# Altium PCB VI.595X5.V1.1.PcbDoc
Units mm, origin at the board's own origin, x right, y up, seen from the top; angles counter-clockwise.
Board outline 86.36 x 66.04 mm, 2 copper layers (Top Layer, Bottom Layer); 110 components, 95 nets, 301 pads, 83 vias.
Unrouted connection lines stored in the file: 1.
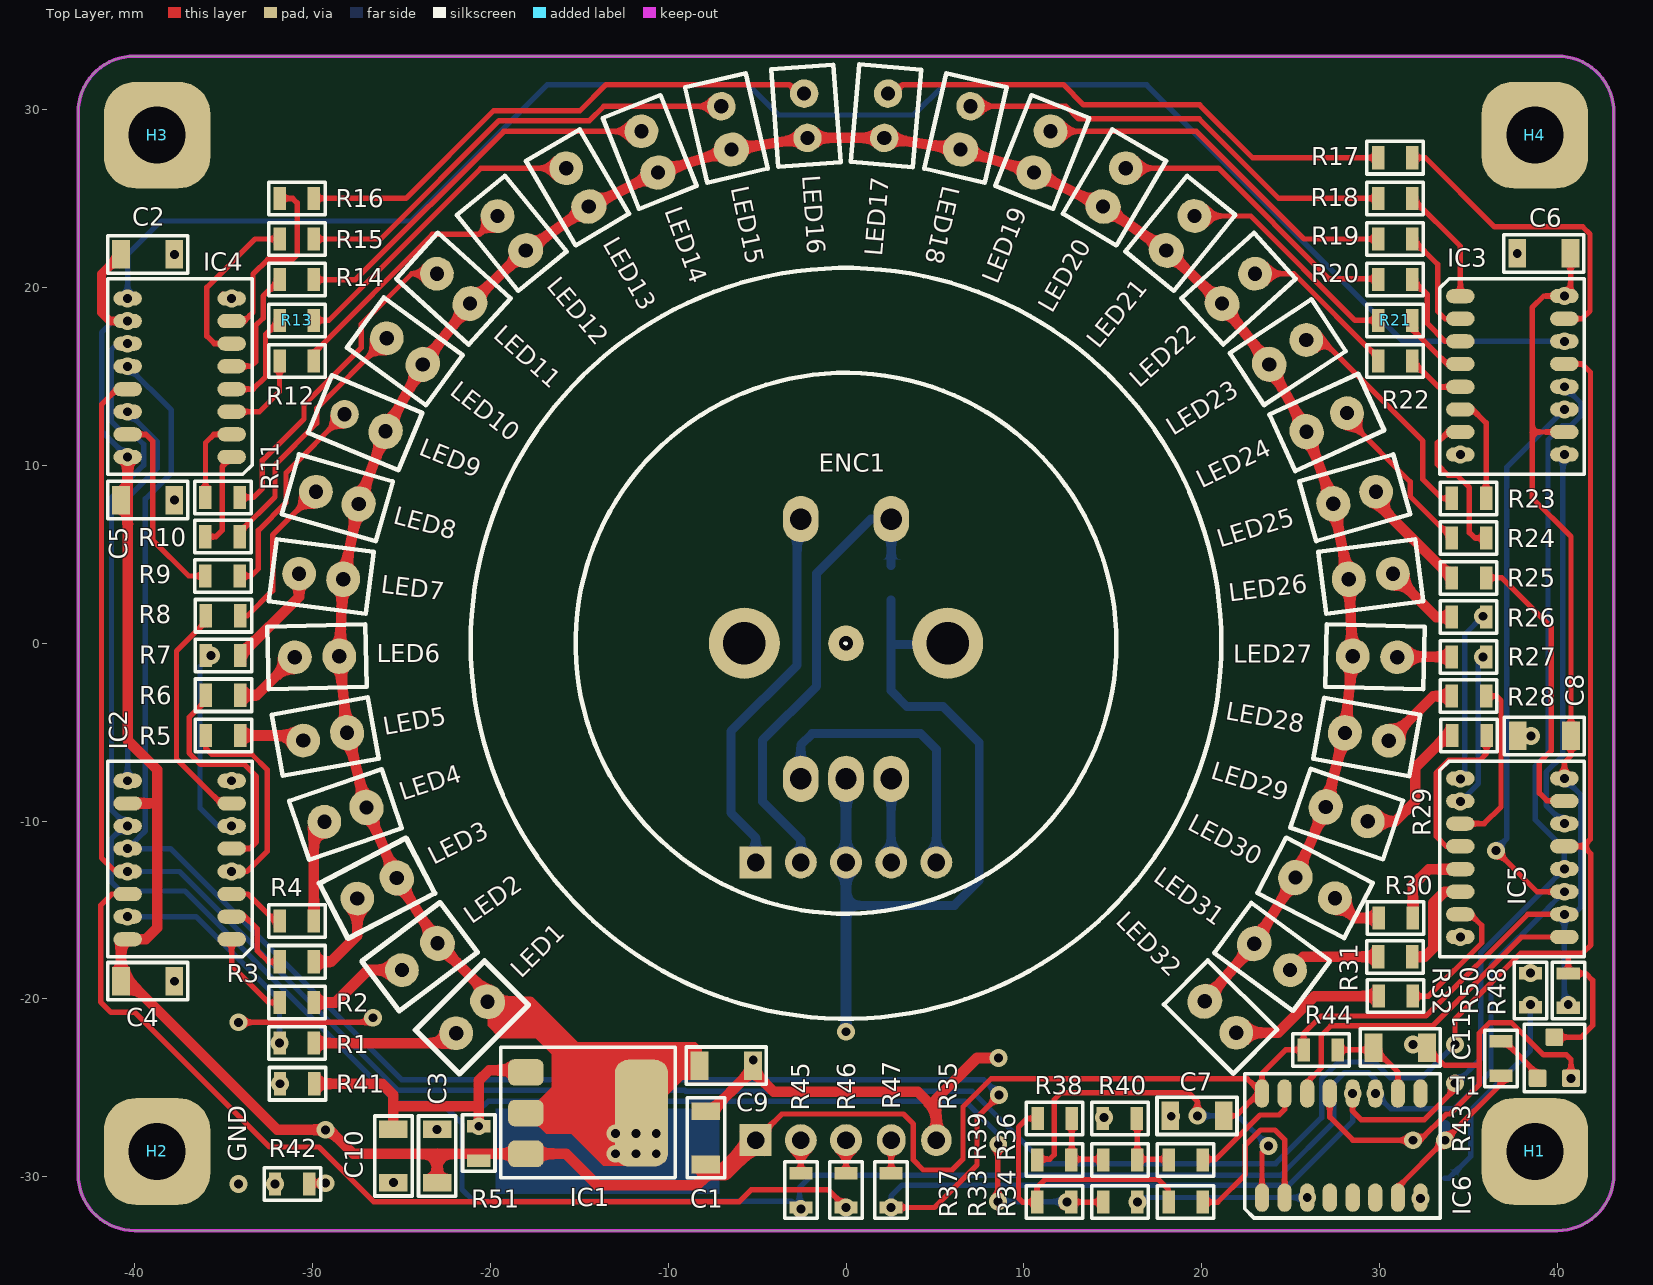
[diagram p0: Top Layer view]
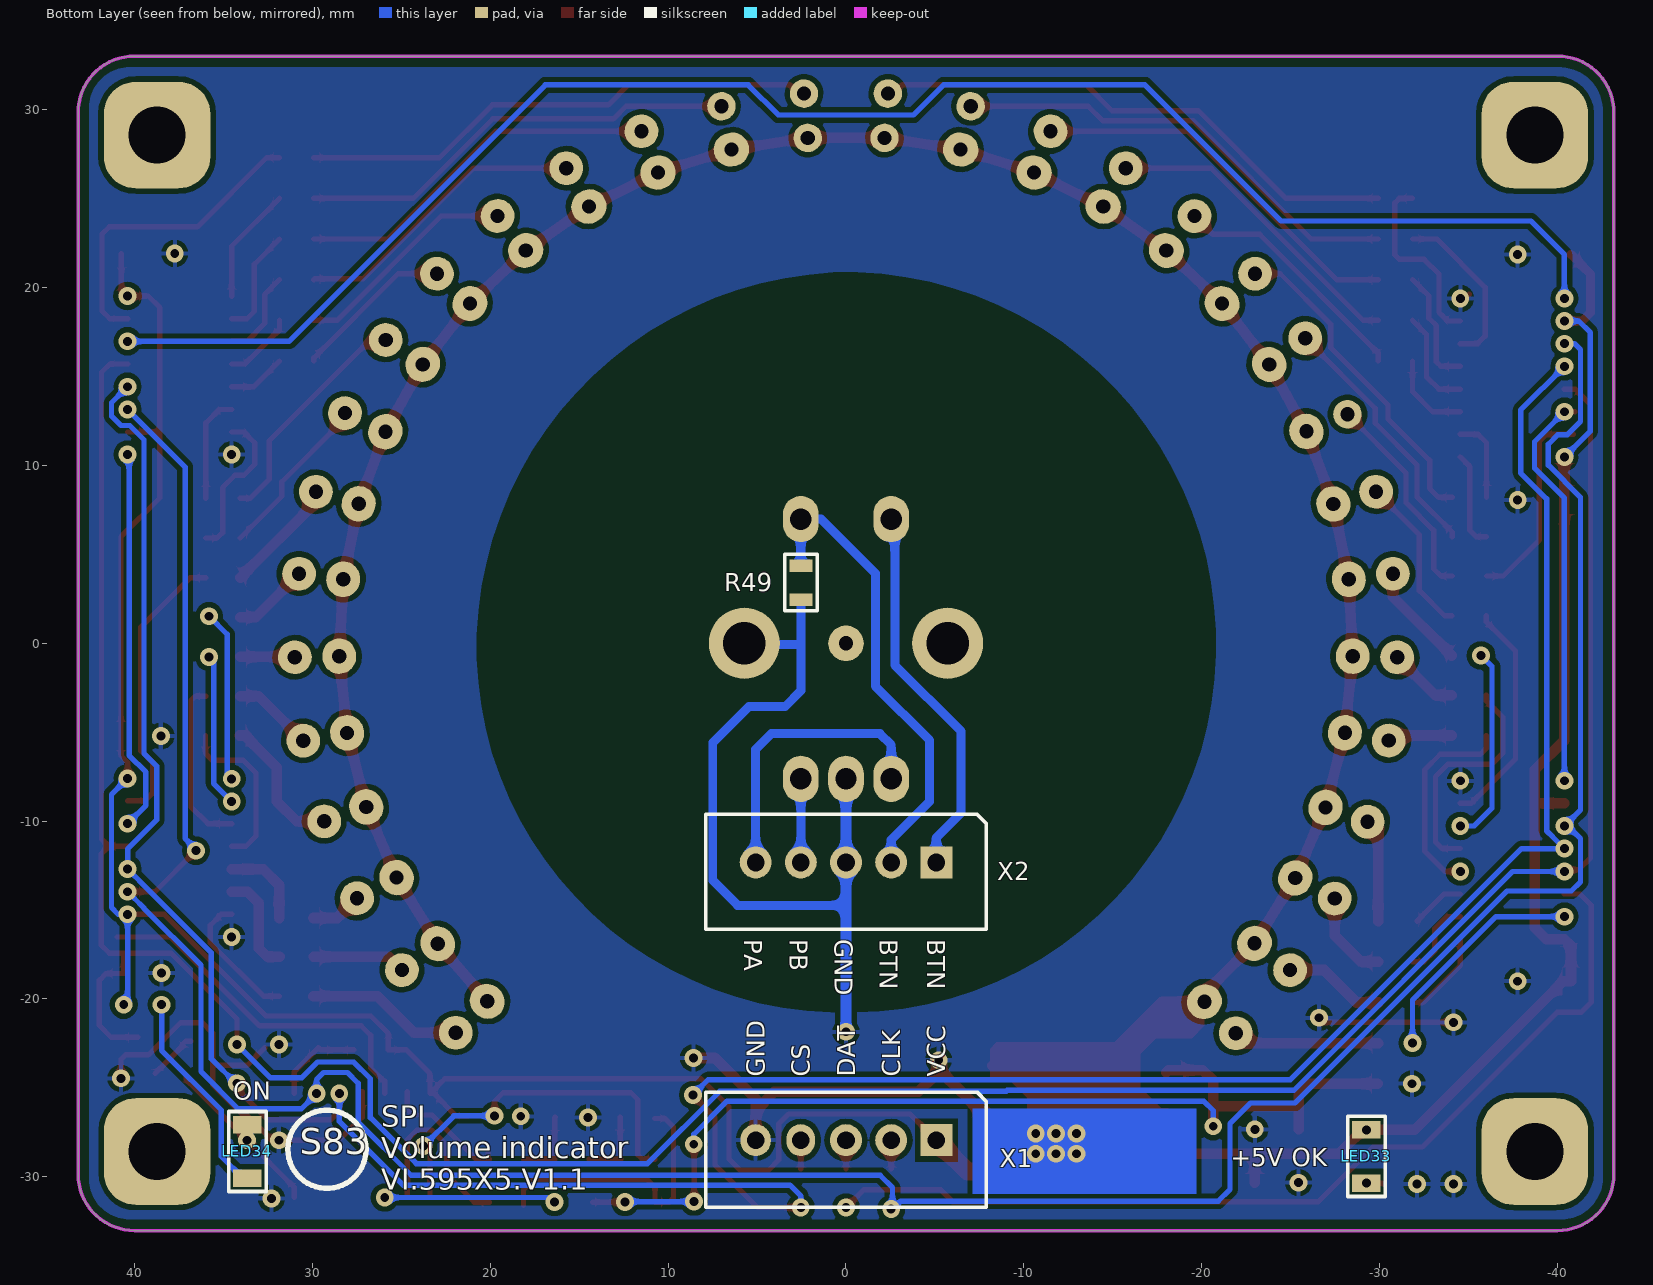
[diagram p1: Bottom Layer view, seen from below]
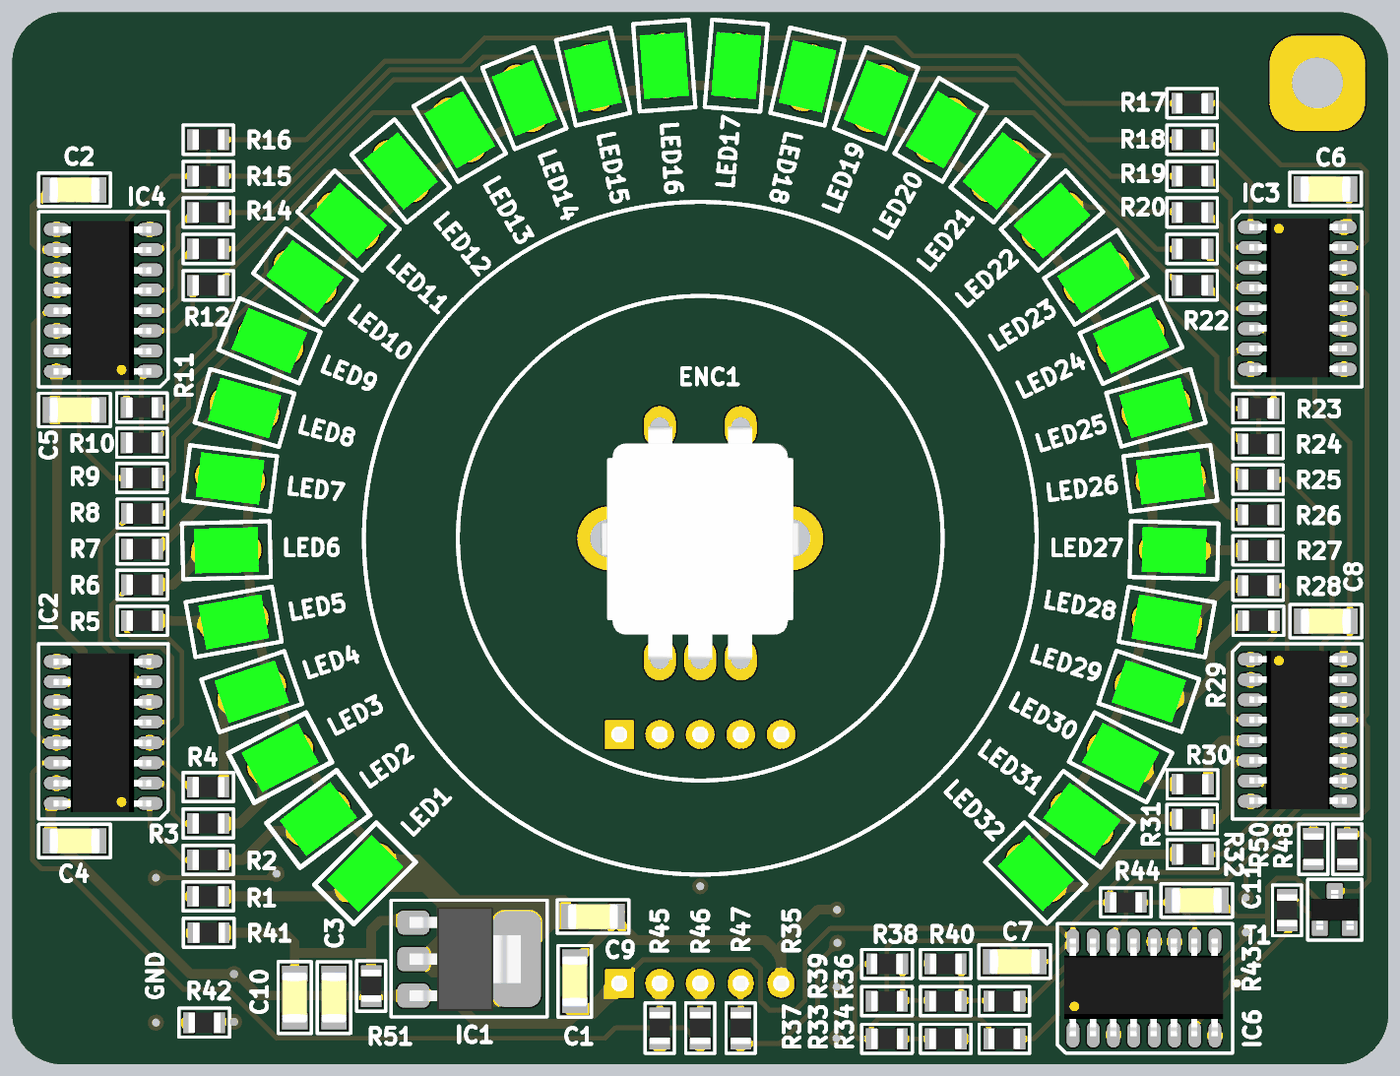
[diagram p2: 3D render of the assembled board from above, using the file's embedded part models]
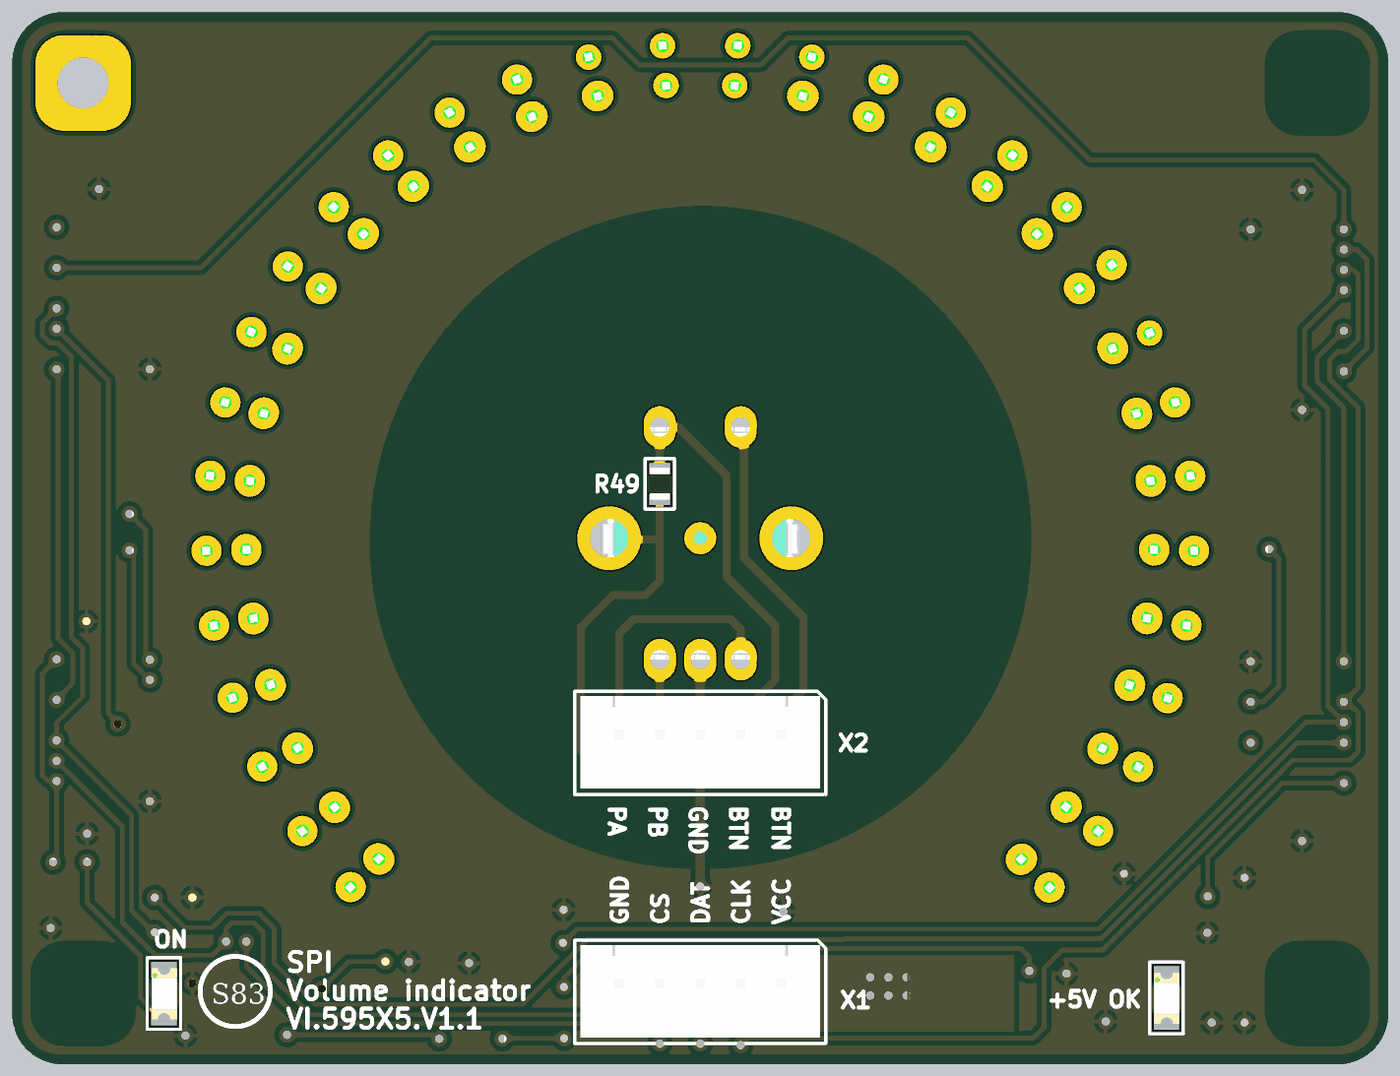
[diagram p3: 3D render of the assembled board from below, using the file's embedded part models]

## Layer stack, top to bottom
Top Solder: solder mask 0.0102, Solder Resist, Dk 3.5
Top Layer: signal copper 0.0356
Dielectric 1: dielectric 0.32, FR-4, Dk 4.8
Bottom Layer: signal copper 0.0356
Bottom Solder: solder mask 0.0102, Solder Resist, Dk 3.5

## Board outline
-43.18,-29.845 -43.18,29.845 cw(c-40.005,29.845) -40.005,33.02 40.005,33.02 cw(c40.005,29.845) 43.18,29.845 43.18,-29.845 cw(c40.005,-29.845) 40.005,-33.02 -40.005,-33.02 cw(c-40.005,-29.845)

## Design rules (kind name [scope] priority, off if disabled: settings)
Clearance [All] p1: gap=0.254 ignorepadtopadclearanceinfootprint=FALSE except(0: Arc-Hole Track-Hole SMDPad-Hole THPad-Hole Via-Hole Fill-Hole Poly-Hole Region-Hole Text-Hole; 0.3: Arc-Poly Track-Poly SMDPad-Poly THPad-Poly Via-Poly Fill-Poly Poly-Poly)
PolygonConnect [All] p1: connectstyle=Relief reliefconductorwidth=0.254 reliefentries=4 polygonreliefangle="90 Angle" airgapwidth=0.254
RoomDefinition VI.595X5.V1.1 [InComponentClass('VI.595X5.V1.1')] p1: confinementstyle=ConfineIn formatcopy=TRUE lockcomponents=FALSE outline 48,-36 54,-36 54,-30 48,-30
RoutingVias [All] p1: holewidth=0.711 width=1.27 viastyle="Through Hole" minholewidth=0.711 minwidth=1.27 maxholewidth=0.711 maxwidth=1.27
SolderMaskExpansion [All] p1: expansion=0.102
Width [All] p1: maxlimit=1.5 minlimit=0.254 preferedwidth=0.254
30 further rules are at their usual default settings.

## Components (designator, comment, footprint, x,y, rotation, side; value= is the part's Value field where it differs from the comment)
C1 "10 мкф" "Конденсатор SMD Case 1206" -7.874,-27.813 r90 top
C2 "10 мкф" "Конденсатор SMD Case 1206" -39.268,21.869 r0 top
C3 "10 мкф" "Конденсатор SMD Case 1206" -22.987,-28.829 r90 top
C4 "10 мкФ" "Конденсатор SMD Case 1206" -39.267,-18.999 r0 top
C5 "10 мкФ" "Конденсатор SMD Case 1206" -39.268,8.052 r0 top
C6 "10 мкФ" "Конденсатор SMD Case 1206" 39.243,21.92 r180 top
C7 "10 мкФ" "Конденсатор SMD Case 1206" 19.736,-26.568 r180 top
C8 "10 мкФ" "Конденсатор SMD Case 1206" 39.268,-5.207 r180 top
C9 "10 мкФ" "Конденсатор SMD Case 1206" -6.731,-23.749 r0 top
C10 "10 мкФ" "Конденсатор SMD Case 1206" -25.451,-28.828 r270 top
C11 "0.1 мкф" "Конденсатор SMD Case 1206" 31.166,-22.733 r0 top
ENC1 "EC11E15204A3" Encoder 1.27,2.54 r0 top
H1 "3.2mm" "Отверстие 3,2"#1 78.501,-46.494 r0 top
H2 "3.2mm" "Отверстие 3,2"#2 72.53,-48.78 r0 top
H3 "3.2mm" "Отверстие 3,2"#3 63.497,-49.439 r0 top
H4 "3.2mm" "Отверстие 3,2"#4 42.903,28.361 r0 top
IC1 "FSP2160B C1002H2" SOT-223 -16.002,-26.416 r270 top
IC2 "74HC595D" SO-16 -37.519,-12.12 r90 top
IC3 "74HC595D" SO-16 37.519,15 r270 top
IC4 "74HC595D" SO-16 -37.519,15 r90 top
IC5 "74HC595D" SO-16 37.519,-12.12 r270 top
IC6 "74HC595D" SO-16 27.913,-28.191 r0 top
LED1 "White" "Светодиод  5x2 mm"#1 -21.036,-21.036 r225 top
LED2 "White" "Светодиод  5x2 mm"#1 -23.969,-17.622 r216.98 top
LED3 "White" "Светодиод  5x2 mm"#1 -26.369,-13.775 r207.58 top
LED4 "White" "Светодиод  5x2 mm"#1 -28.148,-9.631 r198.89 top
LED5 "White" "Светодиод  5x2 mm"#1 -29.283,-5.249 r190.16 top
LED6 "White" "Светодиод  5x2 mm"#1 -29.74,-0.755 r181.45 top
LED7 "White" "Светодиод  5x2 mm"#1 -29.512,3.757 r172.74 top
LED8 "White" "Светодиод  5x2 mm"#1 -28.603,8.18 r163.88 top
LED9 "White" "Светодиод  5x2 mm"#2 -27.043,12.399 r157.43 top
LED10 "White" "Светодиод  5x2 mm"#1 -24.808,16.418 r143.85 top
LED11 "White" "Светодиод  5x2 mm"#1 -22.076,19.943 r137.91 top
LED12 "White" "Светодиод  5x2 mm"#1 -18.803,23.055 r129.2 top
LED13 "White" "Светодиод  5x2 mm"#1 -15.093,25.637 r120.49 top
LED14 "White" "Светодиод  5x2 mm"#1 -11.037,27.627 r111.78 top
LED15 "White" "Светодиод  5x2 mm"#2 -6.726,28.98 r103.07 top
LED16 "White" "Светодиод  5x2 mm"#3 -2.26,29.664 r94.36 top
LED17 "White" "Светодиод  5x2 mm"#3 2.257,29.664 r85.09 top
LED18 "White" "Светодиод  5x2 mm"#2 6.723,28.98 r76.94 top
LED19 "White" "Светодиод  5x2 mm"#1 11.035,27.628 r68.23 top
LED20 "White" "Светодиод  5x2 mm"#1 15.092,25.638 r59.52 top
LED21 "White" "Светодиод  5x2 mm"#1 18.8,23.057 r50.81 top
LED22 "White" "Светодиод  5x2 mm"#1 22.075,19.944 r42.1 top
LED23 "White" "Светодиод  5x2 mm"#1 24.84,16.372 r33.39 top
LED24 "White" "Светодиод  5x2 mm"#1 27.033,12.421 r24.68 top
LED25 "White" "Светодиод  5x2 mm"#1 28.602,8.184 r15.84 top
LED26 "White" "Светодиод  5x2 mm"#1 29.512,3.759 r7.26 top
LED27 "White" "Светодиод  5x2 mm"#1 29.74,-0.753 r358.55 top
LED28 "White" "Светодиод  5x2 mm"#1 29.282,-5.257 r349.82 top
LED29 "White" "Светодиод  5x2 mm"#1 28.156,-9.606 r341.1 top
LED30 "White" "Светодиод  5x2 mm"#1 26.381,-13.753 r332.47 top
LED31 "White" "Светодиод  5x2 mm"#1 23.961,-17.634 r323.65 top
LED32 "White" "Светодиод  5x2 mm"#1 21.059,-21.013 r315.06 top
LED33 "Red" "SMD 1206 Светодиод ВАЙТ" -29.261,-28.854 r270 bottom
LED34 "Green" "SMD 1206 Светодиод ВАЙТ" 33.655,-28.575 r270 bottom
R1 "1 кОм" "SMD 0805 Резистор" -30.861,-22.479 r0 top
R2 "1 кОм" "SMD 0805 Резистор" -30.861,-20.193 r0 top
R3 "1 кОм" "SMD 0805 Резистор" -30.861,-17.907 r0 top
R4 "1 кОм" "SMD 0805 Резистор" -30.861,-15.621 r0 top
R5 "1 кОм" "SMD 0805 Резистор" -35.001,-5.182 r0 top
R6 "1 кОм" "SMD 0805 Резистор" -35.001,-2.921 r0 top
R7 "1 кОм" "SMD 0805 Резистор" -35.001,-0.686 r0 top
R8 "1 кОм" "SMD 0805 Резистор" -35.001,1.549 r0 top
R9 "1 кОм" "SMD 0805 Резистор" -35.027,3.785 r0 top
R10 "1 кОм" "SMD 0805 Резистор" -35.027,5.994 r0 top
R11 "1 кОм" "SMD 0805 Резистор" -35.027,8.204 r0 top
R12 "1 кОм" "SMD 0805 Резистор" -30.861,15.875 r0 top
R13 "1 кОм" "SMD 0805 Резистор" -30.861,18.161 r0 top
R14 "1 кОм" "SMD 0805 Резистор" -30.861,20.447 r0 top
R15 "1 кОм" "SMD 0805 Резистор" -30.861,22.733 r0 top
R16 "1 кОм" "SMD 0805 Резистор" -30.861,25.019 r0 top
R17 "1 кОм" "SMD 0805 Резистор" 30.861,27.305 r180 top
R18 "1 кОм" "SMD 0805 Резистор" 30.861,25.019 r180 top
R19 "1 кОм" "SMD 0805 Резистор" 30.861,22.733 r180 top
R20 "1 кОм" "SMD 0805 Резистор" 30.861,20.447 r180 top
R21 "1 кОм" "SMD 0805 Резистор" 30.861,18.161 r180 top
R22 "1 кОм" "SMD 0805 Резистор" 30.861,15.875 r180 top
R23 "1 кОм" "SMD 0805 Резистор" 35.001,8.153 r180 top
R24 "1 кОм" "SMD 0805 Резистор" 35.001,5.918 r180 top
R25 "1 кОм" "SMD 0805 Резистор" 35.001,3.683 r180 top
R26 "1 кОм" "SMD 0805 Резистор" 35.001,1.473 r180 top
R27 "1 кОм" "SMD 0805 Резистор" 35.001,-0.762 r180 top
R28 "1 кОм" "SMD 0805 Резистор" 35.001,-2.972 r180 top
R29 "1 кОм" "SMD 0805 Резистор" 35.027,-5.182 r180 top
R30 "1 кОм" "SMD 0805 Резистор" 30.886,-15.443 r180 top
R31 "1 кОм" "SMD 0805 Резистор" 30.861,-17.628 r180 top
R32 "1 кОм" "SMD 0805 Резистор" 30.886,-19.837 r180 top
R33 "200 Ом" "SMD 0805 Резистор" 15.392,-31.42 r180 top
R34 "200 Ом" "SMD 0805 Резистор" 19.075,-31.42 r180 top
R35 "200 Ом" "SMD 0805 Резистор" 11.735,-29.058 r0 top
R36 "200 Ом" "SMD 0805 Резистор" 19.075,-29.058 r180 top
R37 "100 Ом" "SMD 0805 Резистор" 11.735,-31.42 r0 top
R38 "100 Ом" "SMD 0805 Резистор" 11.709,-26.721 r180 top
R39 "100 Ом" "SMD 0805 Резистор" 15.392,-29.058 r180 top
R40 "200 Ом" "SMD 0805 Резистор" 15.418,-26.721 r0 top
R41 "*200 Ом" "SMD 0805 Резистор" -30.836,-24.765 r0 top
R42 "1 кОм" "SMD 0805 Резистор" -31.115,-30.404 r0 top
R43 "1 кОм" "SMD 0805 Резистор" 36.83,-23.368 r270 top
R44 "10 кОм" "SMD 0805 Резистор" 26.721,-22.86 r0 top
R45 "47 Ом" "SMD 0805 Резистор" -2.54,-30.734 r90 top
R46 "47 Ом" "SMD 0805 Резистор" 0,-30.734 r90 top
R47 "47 Ом" "SMD 0805 Резистор" 2.54,-30.734 r90 top
R48 "10 кОм" "SMD 0805 Резистор" 40.615,-19.507 r90 top
R49 "0 Ом" "SMD 0805 Резистор" 2.54,3.429 r90 bottom
R50 "1 кОм" "SMD 0805 Резистор" 38.481,-19.533 r270 top
R51 "*470 Ом" "SMD 0805 Резистор" -20.65,-28.092 r90 top
T1 "SI2302 (A2SHB)" "SMD SOT-23 Транзистор 3 pin" 39.827,-23.317 r180 top
X1 "XH2.54-5" "(1x5)pin XH 2.54 Header"#1 0,-27.9 r0 bottom
X2 "XH2.54-5" "(1x5)pin XH 2.54 Header"#2 0,-12.279 r0 bottom

## Footprints (in the part's own frame and the unit in brackets; to place one, negate y for a bottom-side part, rotate by r counter-clockwise, add the part's x,y. Pads: shape width x height; smd on the part's side, far side on the other; paste and mask are expansions set on the pad)
"(1x5)pin XH 2.54 Header"#1 [mm]
  rect 1.8x1.8 hole 1: 1(-5.08,0.04)
  round 1.8 hole 1: 2(-2.54,0.04) 3(0,0.04)
  oval 1.6x1.8 hole 1: 4(2.54,0.04)
  oval 1.7x1.8 hole 1: 5(5.08,0.04)
  silkscreen extent -7.87,-2.67 7.87,3.81, body extent -7.52,-2.37 7.52,3.43, height 7.1
"(1x5)pin XH 2.54 Header"#2 [mm]
  rect 1.8x1.8 hole 1: 1(-5.08,0.04)
  round 1.8 hole 1: 2(-2.54,0.04) 3(0,0.04) 4(2.54,0.04) 5(5.08,0.04)
  silkscreen extent -7.87,-2.67 7.87,3.81, body extent -7.52,-2.37 7.52,3.43, height 7.1
Encoder [mm]
  round 4 hole 2.4: 1(-6.985,-2.54) 2(4.445,-2.54)
  oval 2x2.6 hole 1.2: 3(-3.81,4.445) 4(1.27,4.445) 5(-3.81,-10.16) 6(-1.27,-10.16) 7(1.27,-10.16)
  body extent -7.5,-10.14 4.96,4.46, height 16.5
"SMD 0805 Резистор" [mm]
  rect 0.7x1.3 smd: 1(-0.991,0) 2(0.94,0)
  silkscreen extent -1.6,-0.91 1.57,0.91, body extent -1,-0.62 1,0.63, height 0.6
"SMD 1206 Светодиод ВАЙТ" [mm]
  rect 1x1.6 smd: 1(-1.5,0) 2(1.5,0)
  silkscreen extent -2.25,-1.05 2.25,1.05, body extent -1.57,-0.79 1.63,0.81, height 1.1
"SMD SOT-23 Транзистор 3 pin" [mm]
  rrect20% 1x1 smd: 1(0.94,1.143) 2(0,-1.168) 3(-0.94,1.143)
  silkscreen extent -1.7,-1.91 1.7,1.91, body extent -1.5,-1.25 1.5,1.25, height 1.15
SO-16 [mm]
  oval 0.8x1.6 smd: 1(-4.52,-2.975) 2(-3.25,-2.975) 3(-1.98,-2.975) 4(-0.71,-2.975) 5(0.58,-2.975) 6(1.85,-2.975) 7(3.12,-2.975) 8(4.39,-2.975) 9(4.39,2.875) 10(3.12,2.875) 11(1.85,2.875) 12(0.575,2.875) 13(-0.71,2.875) 14(-1.98,2.875) 15(-3.25,2.875) 16(-4.525,2.875)
  silkscreen extent -5.5,-4.12 5.5,4, body extent -5.07,-3.07 4.9,3.07, height 1.88
SOT-223 [mm]
  rrect50% 1.5x2 smd: 1(-2.29,-2) 2(0,-2) 3(2.29,-2)
  rrect50% 6x3 smd: 4(0,4.5)
  silkscreen extent -3.7,-3.4 3.62,6.4, body extent -3.25,-2.25 3.25,4.75, height 1.66
"Конденсатор SMD Case 1206" [mm]
  rect 1x1.6 smd: 1(-1.5,0) 2(1.5,0)
  silkscreen extent -2.25,-1.05 2.25,1.05, body extent -1.6,-0.8 1.6,0.8, height 0.94
"Отверстие 3,2"#1 [mm]
  rrect60% 6x6 hole 3.2: 1(-39.766,17.919)
"Отверстие 3,2"#2 [mm]
  rrect60% 6x6 hole 3.2: 1(-111.265,20.205)
"Отверстие 3,2"#3 [mm]
  rrect60% 6x6 hole 3.2: 1(-102.232,78.014)
"Отверстие 3,2"#4 [mm]
  rrect60% 6x6 hole 3.2: 1(-4.168,0.214)
"Светодиод  5x2 mm"#1 [mm]
  oval 1.9x2 hole 0.8: 1(-1.25,0)
  round 1.9 hole 0.8: 2(1.25,0)
  silkscreen extent -2.75,-1.75 2.75,1.75, body extent -2,-1.4 2,1.4, height 5.2
"Светодиод  5x2 mm"#2 [mm]
  oval 1.9x2 hole 0.8: 1(-1.25,0)
  round 1.6 hole 0.8: 2(1.25,0)
  silkscreen extent -2.75,-1.75 2.75,1.75, body extent -2,-1.4 2,1.4, height 5.2
"Светодиод  5x2 mm"#3 [mm]
  round 1.6 hole 0.8: 1(-1.25,0) 2(1.25,0)
  silkscreen extent -2.75,-1.75 2.75,1.75, body extent -2,-1.4 2,1.4, height 5.2

## Part data
C1 C2 C3 C4 C5 C6 C7 C8 C9 C10 C11: library part Конденсатор, Case="SMD 1206"
ENC1: library part Encoder_01, Case=-
H1 H2 H3 H4: library part "Отверстие монтажное"
IC1: library part "FSP2160B J1003H1", Case=SOT-223
IC2 IC3 IC4 IC5 IC6: Case=SO-16
LED1 LED2 LED3 LED4 LED5 LED6 LED7 LED8 LED9 LED10 LED11 LED12 LED13 LED14 LED15 LED16 LED17 LED18 LED19 LED20 LED21 LED22 LED23 LED24 LED25 LED26 LED27 LED28 LED29 LED30 LED31 LED32: library part Светодиод, Case=5x2x6
LED33 LED34: library part Светодиод, Case="SMD 1206"
R1 R2 R3 R4 R5 R6 R7 R8 R9 R10 R11 R12 R13 R14 R15 R16 R17 R18 R19 R20 R21 R22 R23 R24 R25 R26 R27 R28 R29 R30 R31 R32 R33 R34 R35 R36 R37 R38 R39 R40 R41 R42 R43 R44 R45 R46 R47 R48 R49 R50 R51: library part Резистор, Case="SMD 0805"
T1: library part "Транзистор MOSFET N-конал (как n-p-n)", Case=SOT-23
X1 X2: library part "(1x5) pin 2.54 Header", Case=XH2.54-5

## Free pads (board coordinates)
  round 2 hole 0.8: 2(0,0)

## Via types
v1: diameter 1, hole 0.5, Top Layer to Bottom Layer, tented both sides, 81 vias
v2: diameter 1, hole 0.5, Top Layer to Bottom Layer, tented bottom, 2 vias

## Nets (pads, with @x,y where several pads share a name; then routed paths per layer and width w, separated by ;. In a path a pad name is that pad's centre, name@x,y a point inside that pad or via, vN(x,y) a via of type N, cw(c..) or ccw(c..) an arc to the next point about the centre after c; other vN are vias at no path point)
!LED24: IC3.9 IC5.14 | length 21.6
  Bottom Layer w0.3: v1(40.394,-10.14) 39.37,-9.116 39.37,-7.239 40.31,-6.299 40.31,10.526 v1(40.394,10.61)
BTN1: ENC1.3 X2.1 | length 21.5
  Bottom Layer w0.5: X2.1 -5.08,-10.922 -6.477,-9.525 -6.477,-4.953 -2.747,-1.223 -2.747,6.778 ENC1.3
BTN2: ENC1.4 R49.2 X2.2 | length 26.5
  Bottom Layer w0.5: X2.2 -2.54,-11.049 -4.699,-8.89 -4.699,-5.461 -1.651,-2.413 -1.651,3.937 1.397,6.985 ENC1.4 R49.2
CLK: IC2.11 IC3.11 IC4.11 IC5.11 IC6.11 R45.1 | length 171.5
  Top Layer w0.3: v1(29.763,-25.316) IC6.11@29.763,-25.214 ; v1(36.551,-11.659) 38.862,-13.97 v1(40.394,-13.97)
  Bottom Layer w0.3: v1(-40.394,16.85) -40.96,16.85 -41.298,16.512 -41.298,12.469 -40.564,11.735 -40.03,11.735 -39.49,11.194 -39.49,10.016 -41.298,8.208 -41.298,-9.366 v1(-40.394,-10.27) -40.583,-10.27 -41.3,-10.987 -41.3,-13.411 -40.782,-13.93 -37.167,-13.93 -25.249,-25.848 -22.742,-25.848 -21.59,-27 -21.59,-30.709 -20.93,-31.369 -3.066,-31.369 -2.619,-31.816 -2.619,-30.61 -1.92,-29.911 24.445,-29.911 27.432,-26.924 27.432,-24.74 28.042,-24.13 29.369,-24.13 29.763,-24.525 v1(29.763,-25.316) 30.619,-26.171 31.903,-26.171 31.909,-26.177 32.658,-26.177 32.664,-26.171 34.179,-26.171 36.271,-24.079 36.271,-18.093 39.49,-14.874 39.49,-14.866 40.02,-14.336 40.028,-14.336 v1(40.394,-13.97) ; v1(36.551,-11.659) 36.551,-11.581 37.159,-10.973 37.159,9.915 v1(40.394,13.15)
  other v1: -2.54,-31.816
DATA: IC2.14 R46.1 | length 54.5
  Top Layer w0.3: IC2.14 -41.278,-14.1 -41.91,-14.732 -41.91,-20.168 -41.326,-20.752 -39.98,-20.752 -32.41,-28.321 -29.642,-28.321 -26.568,-31.394 -5.994,-31.394 -5.334,-30.734 -0.991,-30.734 v1(0,-31.725)
EN: IC6.7 LED34.1 R43.2 | length 10.1
  Top Layer w0.3: IC6.7 31.033,-30.587 v1(33.68,-27.94) 37.109,-24.511 R43.2@37.109,-24.409
  Bottom Layer w0.3: LED34.1 LED34.1@33.68,-27.1
  Bottom Layer w0.6: v1(33.68,-27.94) LED34.1@33.68,-27.1
GND: C1.2 C2.2 C3.2 C4.2 C5.2 C6.2 C7.2 C8.2 C9.2 C10.2 C11.2 ENC1.1 ENC1.2 ENC1.6 IC2.8 IC3.8 IC4.8 IC5.8 IC6.8 IC6.13 R40.1 R41.1 R42.1 R49.1 R50.1 T1.3 X1.5 X2.3 | length 99.9
  Top Layer w0.3: IC4.8@-35.052,19.63 IC4.8@-34.812,19.39 ; v1@-34.138,-21.311 -26.848,-21.311 v1(-26.594,-21.057) ; IC6.13@27.203,-25.214 IC6.13 27.203,-26.645 28.499,-27.94 v1(31.877,-27.94) 32.283,-27.94 33.757,-26.467 33.96,-26.467 35.611,-24.816 35.611,-21.92 36.195,-21.336 37.414,-21.336 39.218,-23.139 40.513,-23.139 40.767,-23.393 v1(40.767,-24.46) ; C11.2 33.656,-23.724 35.56,-23.724 ; IC5.8@34.787,-16.494 IC5.8@34.812,-16.469
  Top Layer w0.6: C1.2 -7.574,-26.313 -5.51,-24.249 -5.431,-24.249 C9.2@-5.231,-24.049 ; v1(-5.214,-23.44) -5.231,-23.457 C9.2 C9.2@-5.231,-24.049 ; X1.5 5.08,-26.264 ; v1@8.585,-23.317 7.366,-23.317 5.08,-25.603 5.08,-26.264 ; C9.2@-5.231,-24.049 -4.058,-25.222 4.039,-25.222 5.08,-26.264
  Bottom Layer w0.5: 0,-14.732 6.096,-14.732 7.493,-13.335 7.493,-5.588 5.461,-3.556 3.429,-3.556 2.54,-2.667 2.54,-0.076 ; R49.1 2.54,-0.076 ; ENC1.2 5.639,-0.076 2.54,-0.076
  Bottom Layer w0.6: v1(0,-21.844) 0,-14.732 X2.3 ENC1.6
  other v1: 32.309,-31.217 -32.106,-30.404 -25.451,-30.328 14.503,-26.67 18.288,-26.594 -31.826,-24.765 8.581,-23.318 31.877,-22.555 -34.163,-21.311 -37.767,-18.999 38.481,-18.542 34.544,-16.51 -34.544,-7.73 38.521,-5.207 -37.768,8.052 34.544,10.61 -34.544,19.39 -37.768,21.869 37.743,21.92
  other v2: -34.163,-30.404 -22.987,-27.329
LATCH: IC2.12 IC3.12 IC4.12 IC5.12 IC6.12 R47.1 | length 176.3
  Top Layer w0.3: v1(2.54,-31.725) 4.978,-31.725 7.366,-29.337 7.366,-26.67 v1@8.611,-25.425 ; v1(28.488,-25.316) 28.488,-26.304 28.981,-26.797 32.512,-26.797 34.163,-25.146 v1@34.163,-24.74
  Bottom Layer w0.3: v1(-40.394,15.575) -37.933,13.114 -37.933,9.585 -39.395,8.123 -39.395,-10.546 -39.49,-10.641 -39.49,-10.644 -40.02,-11.174 -40.023,-11.174 v1(-40.394,-11.545) -37.985,-11.545 -24.995,-24.535 7.746,-24.535 v1(8.611,-25.4) ; v1(2.54,-31.725) 2.54,-31.076 3.151,-30.465 24.907,-30.465 28.488,-26.884 v1(28.488,-25.316) ; v1@34.163,-24.892 v1@34.163,-24.74 ; v1(34.239,-24.74) 34.315,-24.74 35.687,-23.368 35.687,-17.402 39.49,-13.599 39.49,-13.596 40.02,-13.066 40.023,-13.066 v1(40.394,-12.695) 40.394,-11.565 38.76,-9.931 38.76,-6.909 39.472,-6.198 39.472,11.444 40.273,12.246 40.768,12.246 41.298,12.776 41.298,13.524 v1@40.396,14.427
  other v1: 40.394,14.425
LED1: IC2.15 R1.1 | length 12.9
  Bottom Layer w0.3: v1(-40.394,-15.37) -36.548,-15.37 -31.852,-20.066 v1(-31.852,-22.479)
LED2: IC2.1 R2.1 | length 5
  Top Layer w0.3: IC2.1 -34.544,-18.11 -32.461,-20.193 R2.1
LED3: IC2.2 R3.1 | length 4.5
  Top Layer w0.3: IC2.2 -33.779,-15.37 -33.096,-16.053 -33.096,-17.297 -32.487,-17.907 R3.1
LED4: IC2.3 R4.1 | length 3.1
  Top Layer w0.3: IC2.3 -33.627,-14.1 R4.1@-32.106,-15.621
LED5: IC2.4 R5.1 | length 11.7
  Top Layer w0.3: R5.1 -35.992,-5.918 -35.674,-6.236 -33.413,-6.236 -32.537,-7.112 -32.537,-11.684 -33.683,-12.83 v1(-34.544,-12.83)
LED6: IC2.5 R6.1 | length 13.2
  Top Layer w0.3: R6.1 -35.992,-3.226 -36.932,-4.166 -36.932,-6.172 -36.297,-6.807 -33.833,-6.807 -33.147,-7.493 -33.147,-11.176 -33.511,-11.54 IC2.5
LED7: IC2.6 R7.1 | length 11
  Bottom Layer w0.3: v1(-35.712,-0.686) -36.322,-1.295 -36.322,-9.271 -35.323,-10.27 v1(-34.544,-10.27)
LED8: IC2.7 R8.1 | length 12.9
  Top Layer w0.3: R8.1 -35.992,1.219 -37.643,-0.432 -37.643,-6.502 -35.145,-9 IC2.7
LED9: IC4.15 R9.1 | length 11.4
  Top Layer w0.3: IC4.15@-40.905,11.75 -39.36,11.75 -38.989,11.379 -38.989,5.817 -36.957,3.785 R9.1
LED10: IC4.1 R10.1 | length 5.4
  Top Layer w0.3: R10.1 -35.433,5.994 -35.077,6.35 -35.077,9.947 IC4.1
LED11: IC4.2 R11.1 | length 4.7
  Top Layer w0.3: R11.1 -36.017,11.278 -35.545,11.75 IC4.2
LED12: IC4.3 R12.1 | length 4.9
  Top Layer w0.3: IC4.3 -32.979,13.02 -31.852,14.148 R12.1
LED13: IC4.4 R13.1 | length 5.7
  Top Layer w0.3: IC4.4 -33.335,14.29 -32.639,14.986 -32.639,17.374 R13.1
LED14: IC4.5 R14.1 | length 6.6
  Top Layer w0.3: IC4.5 -33.442,15.58 -33.193,15.829 -33.193,17.861 -32.774,18.28 -32.774,19.525 R14.1
LED15: IC4.6 R15.1 | length 9.5
  Top Layer w0.3: IC4.6 -35.519,16.85 -35.941,17.272 -35.941,20.015 -33.223,22.733 R15.1
LED16: IC4.7 R16.1 | length 10.5
  Top Layer w0.3: IC4.7 -33.823,18.12 -33.34,18.603 -33.34,20.762 -32.512,21.59 -31.115,21.59 -30.861,21.844 -30.861,24.765 -31.115,25.019 R16.1
LED17: IC3.15 R17.1 | length 17.7
  Top Layer w0.3: R17.1 32.588,27.305 36.474,23.419 41.427,23.419 41.834,23.012 41.834,18.694 41.389,18.25 IC3.15
LED18: IC3.1 R18.1 | length 6.6
  Top Layer w0.3: R18.1 34.544,22.327 IC3.1
LED19: IC3.2 R19.1 | length 6.1
  Top Layer w0.3: R19.1 33.274,21.311 33.274,18.669 33.693,18.25 IC3.2
LED20: IC3.3 R20.1 | length 5.1
  Top Layer w0.3: R20.1 32.69,19.609 32.69,17.983 33.693,16.98 IC3.3
LED21: IC3.4 R21.1 | length 4
  Top Layer w0.3: R21.1 31.852,17.653 33.795,15.71 IC3.4
LED22: IC3.5 R22.1 | length 3.3
  Top Layer w0.3: R22.1 33.307,14.42 IC3.5
LED23: IC3.6 R23.1 | length 6
  Top Layer w0.3: IC3.6 35.237,13.15 35.992,12.395 R23.1
LED24: IC3.7 R24.1 | length 8.7
  Top Layer w0.3: IC3.7 33.851,11.88 33.249,11.278 33.249,10.058 33.858,9.449 34.366,9.449 35.052,8.763 35.052,6.223 35.357,5.918 R24.1
LED25: IC5.15 R25.1 | length 16
  Top Layer w0.3: R25.1 36.881,3.683 39.649,0.914 39.649,-6.04 38.989,-6.7 38.989,-8.428 39.412,-8.85 40.374,-8.85 IC5.15
LED26: IC5.1 R26.1 | length 9.7
  Bottom Layer w0.3: v1(34.544,-7.62) 34.798,-7.366 34.798,0.508 v1(35.814,1.524)
LED27: IC5.2 R27.1 | length 8.7
  Bottom Layer w0.3: v1(34.544,-8.89) 34.552,-8.89 35.56,-7.882 35.56,-1.016 v1(35.814,-0.762)
LED28: IC5.3 R28.1 | length 9.6
  Top Layer w0.3: IC5.3 35.885,-10.14 36.828,-9.197 36.828,-3.224 36.576,-2.972 R28.1
LED29: IC5.4 R29.1 | length 9.5
  Top Layer w0.3: IC5.4 33.737,-11.41 33.172,-10.846 33.172,-7.29 33.884,-6.579 35.636,-6.579 36.017,-6.198 R29.1
LED30: IC5.5 R30.1 | length 4.9
  Top Layer w0.6: R30.1 31.877,-13.589 32.766,-12.7 IC5.5
LED31: IC5.6 R31.1 | length 5.7
  Top Layer w0.6: R31.1 32.537,-17.628 33.02,-17.145 33.02,-14.605 33.655,-13.97 IC5.6
LED32: IC5.7 R32.1 | length 7.6
  Top Layer w0.3: R32.1 32.754,-19.837 35.748,-16.843 35.748,-15.86 35.128,-15.24 IC5.7
LP: C9.1 IC1.2 IC1.4 LED1.1 LED2.1 LED3.1 LED4.1 LED5.1 LED6.1 LED7.1 LED8.1 LED9.1 LED10.1 LED11.1 LED12.1 LED13.1 LED14.1 LED15.1 LED16.1 LED17.1 LED18.1 LED19.1 LED20.1 LED21.1 LED22.1 LED23.1 LED24.1 LED25.1 LED26.1 LED27.1 LED28.1 LED29.1 LED30.1 LED31.1 LED32.1 | length 153.8
  Top Layer w0.6: IC1.2 IC1.4 -17.765,-20.153 LED1.1 -20.153,-19.688 LED2.1 LED3.1 LED4.1 LED5.1 LED6.1 LED7.1 LED8.1 LED9.1 LED10.1 LED11.1 LED12.1 LED13.1 LED14.1 LED15.1 LED16.1 LED17.1 LED18.1 LED19.1 LED20.1 LED21.1 LED22.1 LED23.1 LED24.1 LED25.1 LED26.1 LED27.1 LED28.1 LED29.1 LED30.1 LED31.1 LED32.1 ; -9.982,-23.749 C9.1
  other v1: -12.954,-28.702 -11.811,-28.702 -10.668,-28.702 -12.954,-27.559 -11.811,-27.559 -10.668,-27.559
NetC10_1: C10.1 IC1.1 R33.2 R37.2 R41.2 R51.2 | length 57.8
  Top Layer w0.3: v1(8.54,-31.394) 8.54,-28.188 v1(8.56,-28.169) ; v1@12.167,-31.674 v1(12.421,-31.42) R37.2 R33.2@14.249,-31.42
  Top Layer w0.6: R41.2 -26.086,-24.765 -25.451,-25.4 C10.1 ; -25.425,-26.035 -20.676,-26.035 ; v1(-20.65,-27.153) -20.65,-24.587 -20.066,-24.003 -18.125,-24.003 IC1.1
  Bottom Layer w0.3: v1(-20.65,-27.153) -20.65,-26.277 -20.114,-25.741 6.691,-25.741 8.56,-27.61 v1(8.56,-28.169) ; v1(8.54,-31.394) v1@12.421,-31.394
NetC11_1: C11.1 IC6.10 R44.2 | length 5.2
  Top Layer w0.3: R44.2 29.539,-22.86 C11.1 31.033,-24.101 IC6.10
NetIC2_9: IC2.9 IC4.14 | length 22.7
  Top Layer w0.3: IC4.14@-40.98,13.02 v1(-40.394,13.02)
  Bottom Layer w0.3: v1(-40.394,-7.73) -40.394,8.166 -38.71,9.851 -38.71,11.336 v1(-40.394,13.02)
NetIC3_14: IC3.14 IC4.9 | length 94.6
  Bottom Layer w0.3: v1(-40.394,19.39) -40.394,21.861 -38.506,23.749 -24.46,23.749 -16.808,31.401 -5.494,31.401 -3.798,29.706 3.805,29.706 5.501,31.402 16.909,31.402 31.331,16.98 v1(40.394,16.98)
NetIC5_9: IC5.9 IC6.14 | length 20.1
  Top Layer w0.3: IC6.14 25.933,-24.663 26.721,-23.876 26.721,-22.047 27.259,-21.509 32.974,-21.509 37.973,-16.51 IC5.9 IC5.9@40.97,-16.51
NetLED1_2: LED1.2 R1.2 | length 8.2
  Top Layer w0.6: R1.2 -22.479,-22.479 LED1.2
NetLED2_2: LED2.2 R2.2 | length 5.7
  Top Layer w0.6: R2.2 -28.702,-20.193 -26.883,-18.374 LED2.2
NetLED3_2: LED3.2 R3.2 | length 5.1
  Top Layer w0.6: R3.2 -28.956,-17.907 -27.476,-16.427 LED3.2
NetLED4_2: LED4.2 R4.2 | length 5.8
  Top Layer w0.6: R4.2 -29.921,-10.626 LED4.2
NetLED5_2: LED5.2 R5.2 | length 3.7
  Top Layer w0.6: R5.2 -30.802,-5.182 LED5.2
NetLED6_2: LED6.2 R6.2 | length 4
  Top Layer w0.6: R6.2 -33.125,-2.921 LED6.2
NetLED7_2: LED7.2 R7.2 | length 6
  Top Layer w0.6: R7.2 -30.752,2.624 LED7.2
NetLED8_2: LED8.2 R8.2 | length 9
  Top Layer w0.3: R8.2 -33.655,1.549 -32.24,2.964 -32.24,6.091 LED8.2
NetLED9_2: LED9.2 R9.2 | length 11.9
  Top Layer w0.3: R9.2 -33.452,3.785 -33.045,4.191 -33.045,6.35 -31.488,7.908 -31.488,9.588 LED9.2
NetLED10_2: LED10.2 R10.2 | length 14.4
  Top Layer w0.3: R10.2 -34.087,6.248 -32.106,8.23 -32.106,10.033 -29.761,12.378 -29.761,13.212 LED10.2@-25.973,17
NetLED11_2: LED11.2 R11.2 | length 18.4
  Top Layer w0.3: R11.2 -33.325,8.204 -32.817,8.712 -32.817,10.287 -30.48,12.624 -30.48,13.393 -27.248,16.625 -27.248,17.948 -24.415,20.781 LED11.2
NetLED12_2: LED12.2 R12.2 | length 14
  Top Layer w0.3: R12.2 -29.921,16.335 -23.256,23 -20.616,23 LED12.2
NetLED13_2: LED13.2 R13.2 | length 17.7
  Top Layer w0.3: R13.2 -29.083,18.161 -20.53,26.714 LED13.2
NetLED14_2: LED14.2 R14.2 | length 21.9
  Top Layer w0.3: R14.2 -27.58,20.447 -19.24,28.788 LED14.2
NetLED15_2: LED15.2 R15.2 | length 26
  Top Layer w0.3: R15.2 -26.162,22.733 -19.507,29.388 -14.427,29.388 -13.618,30.197 LED15.2
NetLED16_2: LED16.2 R16.2 | length 30.4
  Top Layer w0.3: R16.2 -24.74,25.019 -19.812,29.947 -14.961,29.947 -13.493,31.415 -3.18,31.415 -2.676,30.91 LED16.2
NetLED17_2: LED17.2 R17.2 | length 29.5
  Top Layer w0.3: LED17.2 2.683,30.91 3.189,31.416 5.254,31.416 12.221,31.416 13.36,30.277 19.888,30.277 22.86,27.305 R17.2
NetLED18_2: LED18.2 R18.2 | length 25.1
  Top Layer w0.3: LED18.2 12.362,30.198 13.071,29.489 19.863,29.489 24.333,25.019 R18.2
NetLED19_2: LED19.2 R19.2 | length 20.9
  Top Layer w0.3: LED19.2 19.7,28.788 25.756,22.733 R19.2
NetLED20_2: LED20.2 R20.2 | length 16.8
  Top Layer w0.3: LED20.2 20.935,26.715 27.157,20.493 29.875,20.493 R20.2
NetLED21_2: LED21.2 R21.2 | length 12.8
  Top Layer w0.3: LED21.2 22.761,24.026 28.626,18.161 R21.2
NetLED22_2: LED22.2 R22.2 | length 9.1
  Top Layer w0.3: LED22.2 25.192,20.782 29.921,16.053 R22.2
NetLED23_2: LED23.2 R23.2 | length 13.1
  Top Layer w0.3: LED23.2 26.756,17.059 32.436,11.379 32.436,9.22 33.503,8.153 R23.2
NetLED24_2: LED24.2 R24.2 | length 9.6
  Top Layer w0.3: LED24.2@28.335,13.109 28.335,12.471 31.726,9.079 31.726,8.253 R24.2
NetLED25_2: LED25.2 R25.2 | length 6.6
  Top Layer w0.6: LED25.2 29.805,7.94 R25.2
NetLED26_2: LED26.2 R26.2 | length 4.3
  Top Layer w0.6: LED26.2 33.195,1.473 R26.2
NetLED27_2: LED27.2 R27.2 | length 3.1
  Top Layer w0.6: LED27.2 31.013,-0.762 R27.2
NetLED28_2: LED28.2 R28.2 | length 4.6
  Top Layer w0.6: LED28.2 33.019,-2.972 R28.2
NetLED29_2: LED29.2 R29.2 | length 7.9
  Top Layer w0.6: LED29.2 30.883,-10.011 32.004,-8.89 32.004,-6.985 33.807,-5.182 R29.2
NetLED30_2: LED30.2 R30.2 | length 2.9
  Top Layer w0.6: LED30.2 28.602,-15.443 R30.2
NetLED31_2: LED31.2 R31.2 | length 5.3
  Top Layer w0.6: LED31.2 25.715,-17.628 R31.2
NetLED32_2: LED32.2 R32.2 | length 8.9
  Top Layer w0.6: LED32.2 24.289,-21.896 26.348,-19.837 R32.2
NetLED33_2: LED33.2 R42.2 | length 0.9
  Top Layer w0.3: R42.2 -30.126,-30.354 v1(-29.261,-30.354)
NetLED34_2: LED34.2 R50.2 | length 11.9
  Bottom Layer w0.3: LED34.2 33.908,-30.075 35.128,-28.854 35.128,-26.238 38.481,-22.885 v1(38.481,-20.32)
NetR34_2: R34.2 R37.1 R38.2 | length 15.9
  Top Layer w0.3: R38.2 10.185,-26.721 9.703,-27.203 9.703,-31.191 9.931,-31.42 R37.1 10.744,-30.607 11.201,-30.15 17.577,-30.15 18.136,-30.709 R34.2 R34.2@18.136,-31.598
NetR35_2: R35.2 R38.1 R39.2 | length 4.2
  Top Layer w0.3: R38.1@12.7,-26.645 R38.1 12.7,-28.981 12.675,-29.007 R39.2@14.453,-29.007
NetR36_2: R36.2 R39.1 R40.2 | length 4.1
  Top Layer w0.3: R40.2@16.358,-26.645 16.383,-26.67 16.383,-29.007 R36.2@18.136,-29.007
NetR43_1: R43.1 T1.1 | length 2.8
  Top Layer w0.3: R43.1 37.13,-22.377 37.33,-22.577 37.33,-22.664 T1.1@38.851,-24.185
NetR45_2: R45.2 X1.2 | length 1.6
  Top Layer w0.3: R45.2@-2.54,-29.54 X1.2
NetR46_2: R46.2 X1.3 | length 1.6
  Top Layer w0.3: R46.2@0,-29.54 X1.3
NetR47_2: R47.2 X1.4 | length 1.6
  Top Layer w0.3: R47.2@2.54,-29.54 X1.4
OE: IC2.13 IC3.13 IC4.13 IC5.13 R48.2 T1.2 | length 169
  Top Layer w0.3: v1(-40.394,-12.83) -40.49,-12.734 -41.19,-12.734 -41.859,-12.065 -41.859,13.437 -41.006,14.29 IC4.13 ; v1(34.239,-22.555) 34.239,-21.133 37.948,-17.424 41.427,-17.424 41.885,-16.967 41.885,-11.836 41.458,-11.41 ; T1.2 41.326,-22.149 41.986,-21.488 41.986,-18.948 41.605,-18.567 R48.2 40.615,-17.475 ; IC5.13 41.458,-11.41 ; IC3.13 41.389,15.71 41.859,15.24 41.859,-11.009 41.458,-11.41
  Bottom Layer w0.3: v1(-40.394,-12.83) -37.483,-12.83 -25.182,-25.131 -9.072,-25.131 -9.017,-25.187 7.094,-25.187 11.168,-29.261 24.155,-29.261 26.746,-26.67 26.746,-24.486 27.686,-23.546 29.718,-23.546 30.607,-24.435 32.359,-24.435 v1(34.239,-22.555)
PHA: ENC1.5 X2.5 | length 16.5
  Bottom Layer w0.5: ENC1.5 -2.54,-5.715 -1.905,-5.08 4.191,-5.08 5.08,-5.969 X2.5
PHB: ENC1.7 X2.4 | length 4.7
  Bottom Layer w0.5: X2.4 ENC1.7
R2R_1: IC6.15 R36.1 | length 7
  Top Layer w0.3: R36.1@20.066,-29.007 20.803,-29.007 23.29,-26.52 24.356,-26.52 24.663,-26.213 IC6.15 IC6.15@24.663,-25.214 ; R36.1@20.117,-28.956 R36.1@20.117,-28.677
R2R_2: IC6.1 R35.1 | length 21.1
  Top Layer w0.3: R35.1@10.744,-29.007 11.455,-29.007 11.709,-28.753 11.709,-25.654 12.09,-25.273 19.279,-25.273 19.761,-25.756 v1(19.761,-26.568) ; IC6.1 23.393,-28.626 v1(23.749,-28.27)
  Bottom Layer w0.3: v1(19.761,-26.568) 22.047,-26.568 v1(23.749,-28.27)
R2R_4: IC6.2 R34.1 | length 10.7
  Top Layer w0.3: R34.1 20.904,-31.42 22.454,-29.87 22.454,-28.219 23.307,-27.366 24.123,-27.366 24.337,-27.58 24.663,-27.906 IC6.2
R2R_8: IC6.3 R33.1 | length 9.7
  Bottom Layer w0.3: v1(16.383,-31.42) 16.572,-31.42 16.826,-31.166 v1(25.933,-31.166)
VCC: C1.1 C2.1 C3.1 C4.1 C5.1 C6.1 C7.1 C8.1 IC1.3 IC2.10 IC2.16 IC3.10 IC3.16 IC4.10 IC4.16 IC5.10 IC5.16 IC6.16 LED33.1 R44.1 R48.1 R51.1 X1.1 | length 199.7
  Top Layer w0.3: X1.1 -3.607,-26.467 3.226,-26.467 3.785,-27.026 3.785,-29.058 4.343,-29.616 5.969,-29.616 6.579,-29.007 6.579,-26.06 8.153,-24.486 22.558,-24.486 IC6.16 ; C7.1 21.92,-26.568 23.173,-25.316 IC6.16 ; v1(40.394,-15.24) 38.333,-15.24 32.618,-20.955 26.721,-20.955 25.73,-21.946 R44.1 24.717,-22.86 23.388,-24.189 IC6.16 ; v1(40.394,-7.595) 40.394,-6.698 40.768,-6.323 C8.1 40.768,6.001 38.583,8.187 38.583,11.88 ; IC3.10 38.583,11.88 ; C6.1 40.743,19.874 v1(40.394,19.525) 39.235,19.525 38.583,18.872 38.583,11.88
  Top Layer w0.5: C2.1 -41.859,20.779 -41.859,18.593 -41.386,18.12 v1(-40.394,18.12)
  Top Layer w0.6: IC2.10 -38.752,-9 -38.735,-9.017 ; IC4.16@-40.386,10.475 -40.386,-5.461 -38.735,-7.112 -38.735,-9.017 ; C3.1 -22.987,-28.706 ; C1.1@-7.62,-29.694 -8.406,-30.48 -13.97,-30.48 -15.744,-28.706 IC1.3 -22.987,-28.706 ; -38.735,-9.017 -38.735,-16.002 -39.378,-16.645 IC2.16 -40.767,-17.018 C4.1 -40.335,-18.999 -31.98,-27.354 -29.059,-27.354 -27.707,-28.706 -22.987,-28.706
  Top Layer w1: C1.1@-7.62,-29.694 -6.834,-29.694 X1.1
  Bottom Layer w0.3: v1(-40.394,10.475) -41.852,11.933 -41.852,17.469 -41.201,18.12 v1(-40.394,18.12) ; v1(40.394,-7.595) 41.3,-8.501 41.3,-14.859 40.919,-15.24 v1(40.394,-15.24) 40.394,-20.099 v1(40.615,-20.32)
  other v1: -29.261,-27.356
pads on no net: H1.1 H2.1 H3.1 H4.1 IC6.4 IC6.5 IC6.6 IC6.9

## Polygon pours and split planes (outlines as drawn)
GND on Bottom Layer "Bottom Layer-No Net 1" (solid, pour order 0): -40.259,32.385 40.259,32.385 cw(c40.259,30.099) 42.545,30.099 42.545,-30.099 cw(c40.259,-30.099) 40.259,-32.385 36.195,-32.385 -40.208,-32.385 cw(c-40.208,-30.048) -42.545,-30.048 -42.545,30.099 cw(c-40.089,29.929)

## Keep-outs
Keep-Out Layer:
  the board outline again, w0.2

## Other copper
Top Layer:
  region net LP: -18.002,-26.416 -16.535,-24.949 -16.535,-23.089 -16.561,-23.089 -17.45,-22.2 -19.456,-22.2 -20.153,-21.503 -20.153,-20.153 -17.765,-20.153 -15.49,-22.428 -8.458,-22.428 -8.103,-22.784 -8.103,-24.536 -9.169,-24.536 -10.185,-25.552 -10.185,-28.829 -10.744,-29.388 -13.64,-29.388 -15.443,-27.584 -16.866,-27.584 -17.577,-26.873 -17.348,-26.645 -17.323,-26.645
Bottom Layer:
  rectangle net LP: -19.71,-30.963 -7.112,-26.162
  pour cut-out: -20.777,0.055 ccw(c-0.19,-0.168) 0.199,-20.752 ccw(c0.199,-0.199) 20.752,-0.199 ccw(c-0.367,-0.251) 0.031,20.864 ccw(c0.031,0.055)

## Silkscreen, mask and mechanical layers (free items; w line width, h text height)
Top Overlay:
  circle w0.254: c0,0 r15.209
  circle w0.254: c0,0 r21.108
  lines w0.2: -0.076,0 0,0 0,-0.025
  text "GND" at -33.731,-29.159 h1 r90
Bottom Overlay:
  circle w0.3: c29.185,-28.448 r2.2
  text "BTN" at -4.572,-16.637 h1 r90
  text "BTN" at -1.905,-16.637 h1 r90
  text "GND" at 0.635,-16.637 h1 r90
  text "PB" at 3.175,-16.637 h1 r90
  text "PA" at 5.715,-16.637 h1 r90
  text "VCC" at -5.588,-24.384 h1 r270
  text "CLK" at -3.048,-24.384 h1 r270
  text "DAT" at -0.508,-24.384 h1 r270
  text "CS" at 2.032,-24.384 h1 r270
  text "GND" at 4.572,-24.384 h1 r270
  text "ON" at 34.442,-25.654 h1
  text "SPI" at 26.137,-27.178 h1.2
  text "Volume indicator" at 26.137,-28.956 h1.2
  text "S83" at 30.709,-29.21 h2.5
  text "+5V OK" at -21.641,-29.413 h1
  text "VI.595X5.V1.1" at 26.137,-30.734 h1.2